# Altium PCB CCE_Simonduino_01.PcbDoc
Units mil, origin at the board's own origin, x right, y up, seen from the top; angles counter-clockwise.
Board outline 4000 x 4000 mil, 2 copper layers (Top Layer, Bottom Layer), stack 62.8 mil thick; 87 components, 68 nets, 309 pads, 113 vias.
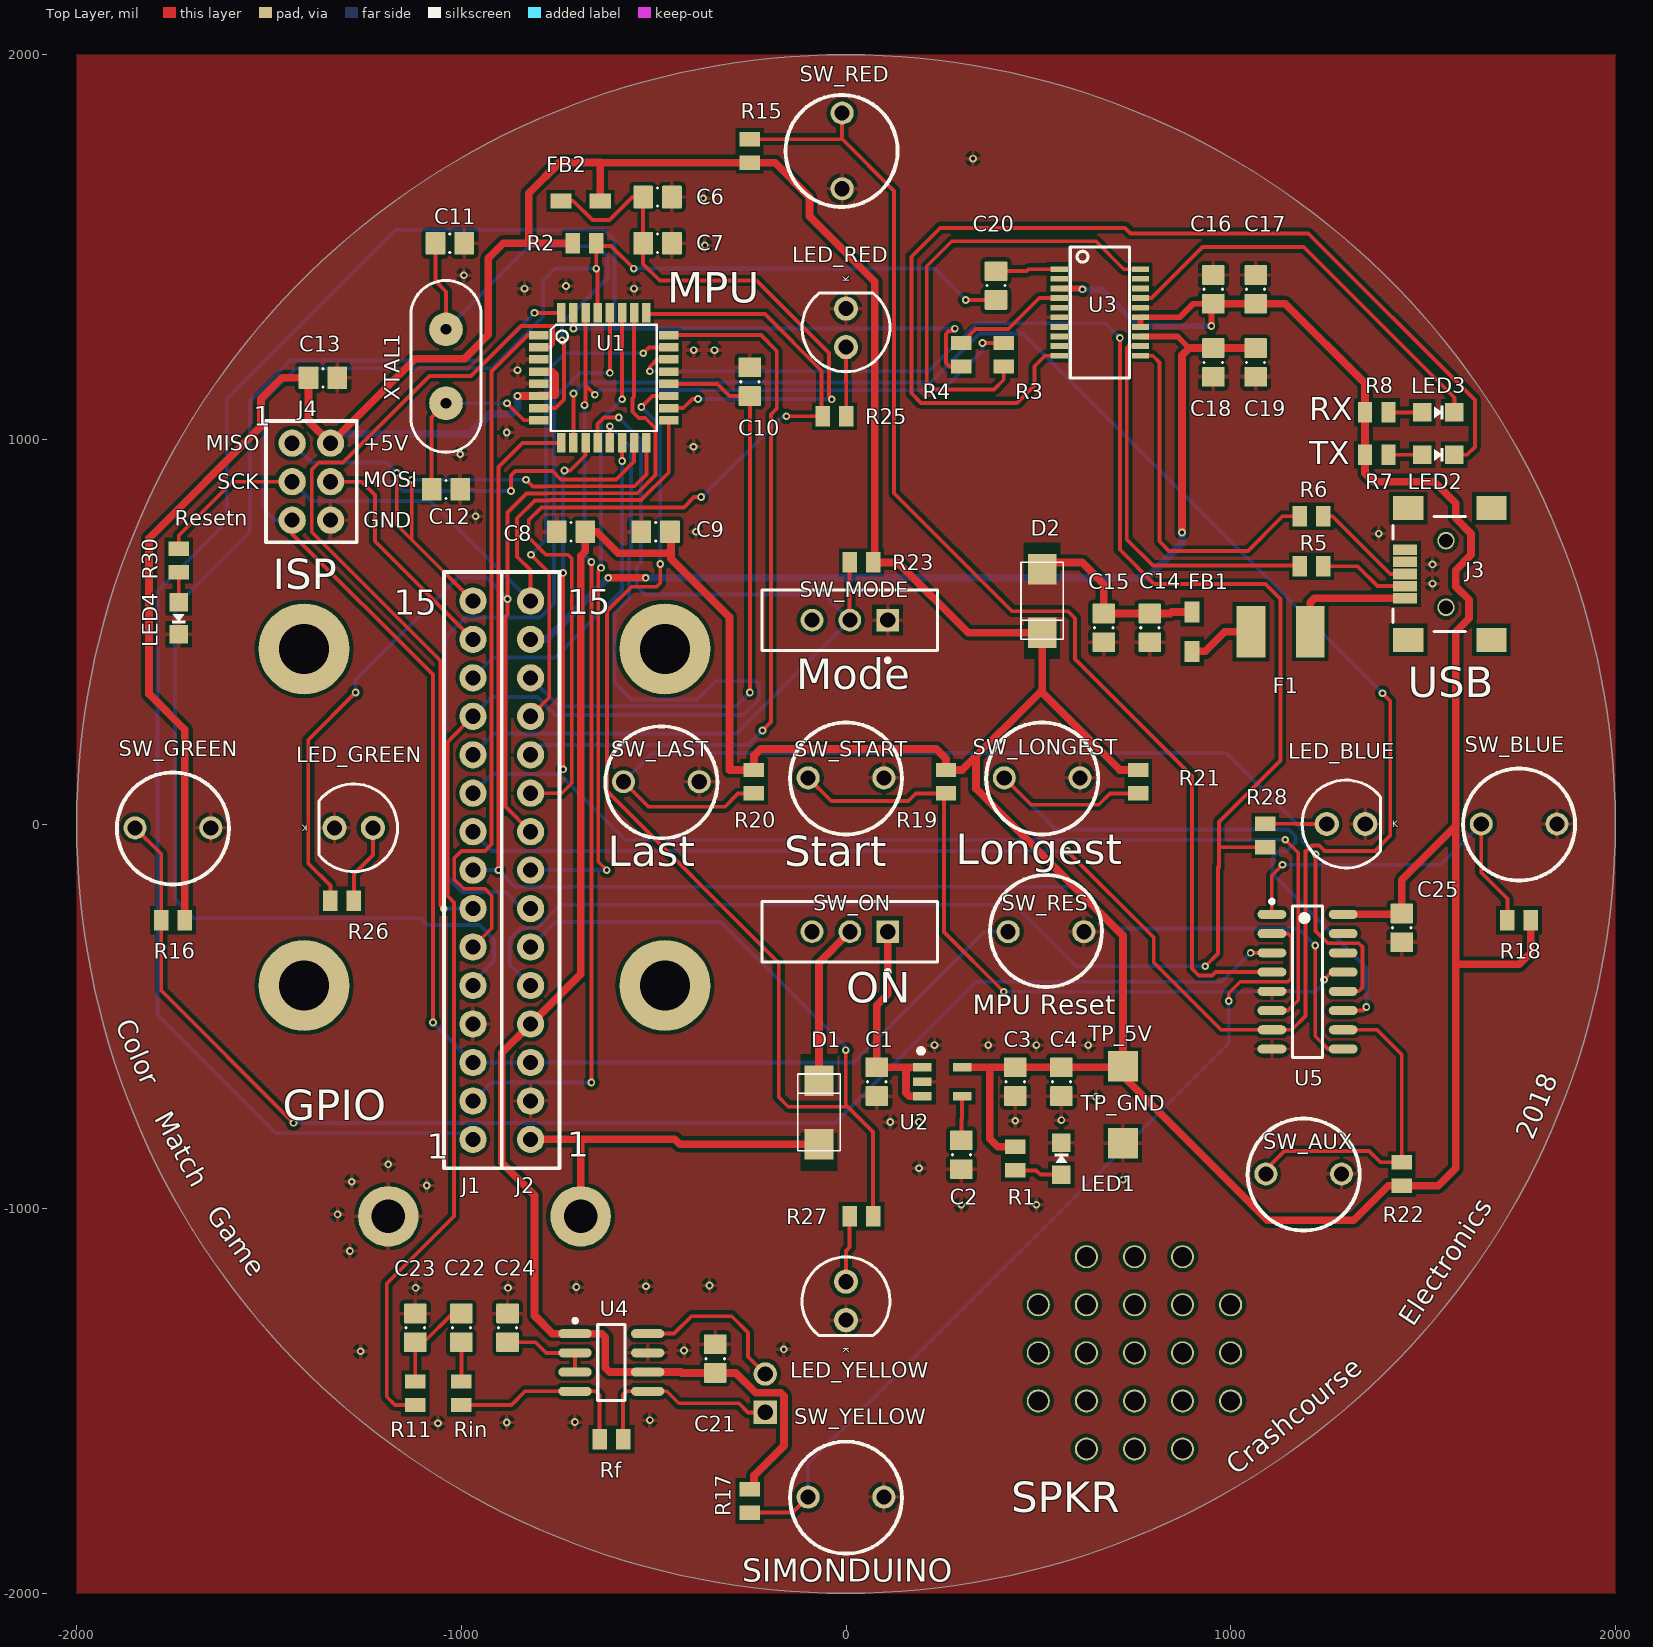
[diagram p0: Top Layer view]
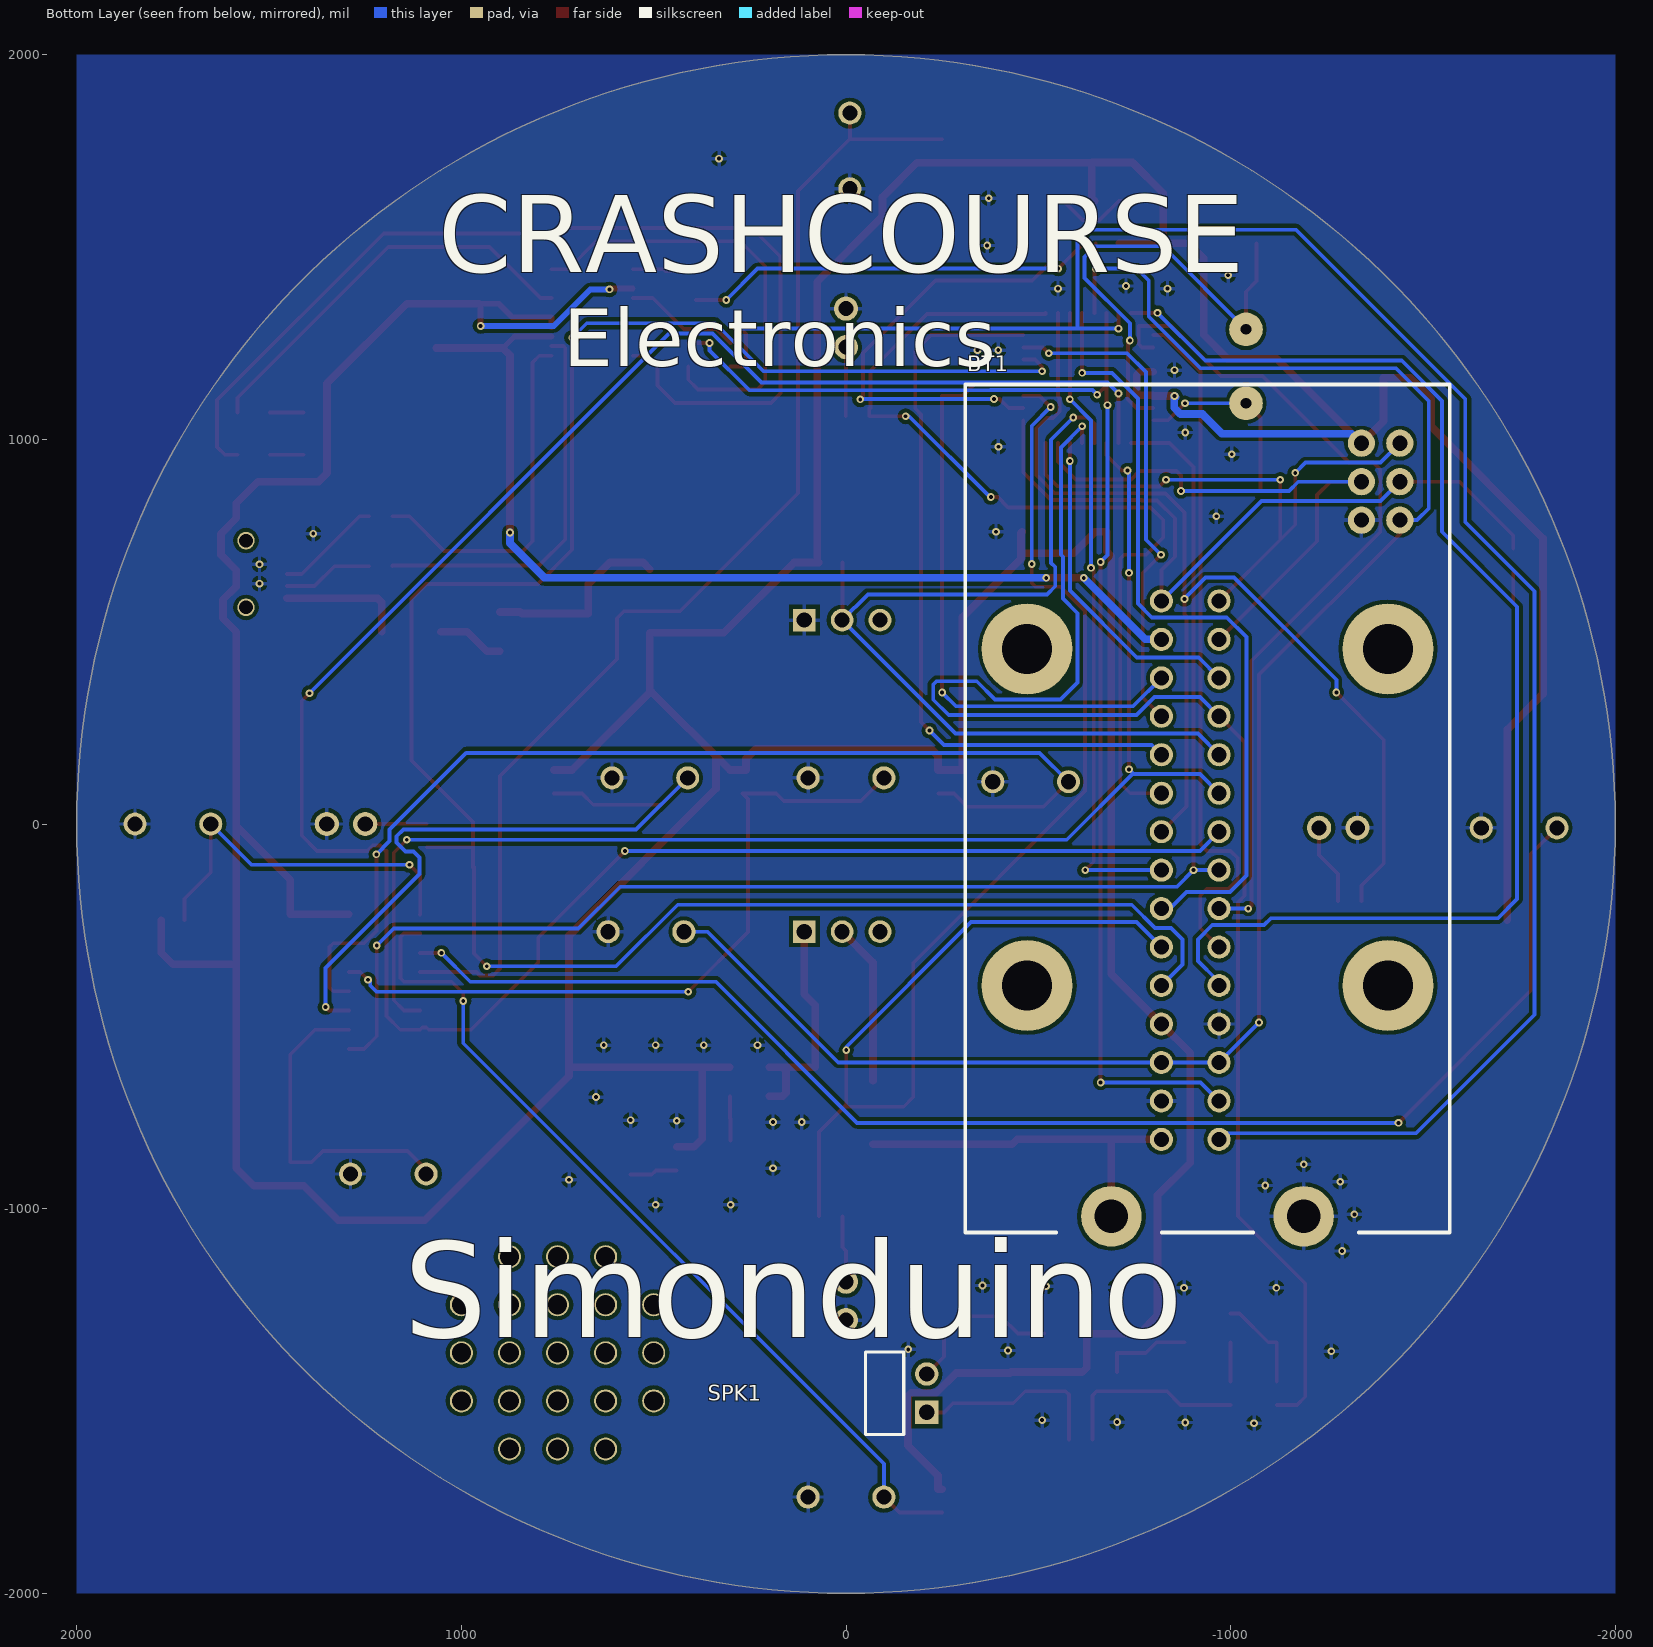
[diagram p1: Bottom Layer view, seen from below]

## Layer stack, top to bottom
Top Solder: solder mask 1, Solder Resist, Dk 3.5
Top Layer: signal copper 1.4
Dielectric 1: core 60, FR-4, Dk 4.6
Bottom Layer: signal copper 1.4
Bottom Solder: solder mask 1, Solder Resist, Dk 3.5

## Board outline
-2000,0 ccw(c0,0) 0,-2000 ccw(c0,0) 2000,0 ccw(c0,0) 0,2000 ccw(c0,0)

## Design rules (kind name [scope] priority, off if disabled: settings)
AssemblyTestPointUsage AssemblyTestPointUsage_1 [All] p2:
AssemblyTestpoint AssemblyTestpoint_1 [All] p2: testpointundercomponent=TRUE minsize=40 maxsize=100 preferedsize=60 minholesize=0 maxholesize=40 preferedholesize=32 testpointgrid=1 usegrid=TRUE gridtolerance=0.01 allowsidetop=TRUE allowsidebottom=TRUE
Clearance [All] p1: gap=10 ignorepadtopadclearanceinfootprint=FALSE except(0: Arc-Hole Track-Hole SMDPad-Hole THPad-Hole Via-Hole Fill-Hole Poly-Hole Region-Hole Text-Hole)
Clearance Clearance_1 [All] p2: gap=8 ignorepadtopadclearanceinfootprint=FALSE except(0: Arc-Hole Track-Hole SMDPad-Hole THPad-Hole Via-Hole Fill-Hole Poly-Hole Region-Hole Text-Hole)
ComponentClearance ComponentClearance_1 [All] p2: gap=10 collisioncheckmode=3 verticalgap=10 showdistances=FALSE
DiffPairsRouting DiffPairsRouting_1 [All] p2: maxlimit=10 minlimit=10 mostfreqgap=10 toplayer_minwidth=15 toplayer_maxwidth=15 toplayer_prefwidth=15 bottomlayer_minwidth=15 bottomlayer_maxwidth=15 bottomlayer_prefwidth=15 maxuncoupledlength=500
FabricationTestPointUsage FabricationTestPointUsage_1 [All] p2: valid=0 allowmultiple=FALSE
FabricationTestpoint FabricationTestpoint_1 [All] p2: side=3 testpointundercomponent=TRUE minsize=40 maxsize=100 preferedsize=60 minholesize=0 maxholesize=40 preferedholesize=32 testpointgrid=1 allowsidetop=TRUE allowsidebottom=TRUE usegrid=TRUE gridtolerance=0.01
FanoutControl Fanout_LCC [IsLCC] p1: bgadir=Out bgaviamode=Centered fanoutstyle=Auto fanoutdirection=Alternating viagrid=1 // Fanout_LCC (Default Rule)
FanoutControl Fanout_BGA [IsBGA] p2: bgadir=Out bgaviamode=Centered fanoutstyle=Auto fanoutdirection=Alternating viagrid=1 // Fanout_BGA (Default Rule)
FanoutControl Fanout_Default [All] p4: bgadir=Out bgaviamode=Centered fanoutstyle=Auto fanoutdirection=Alternating viagrid=1 // Fanout_Default (Default Rule)
FanoutControl Fanout_Small [(CompPinCount < 5)] p5: bgadir=Out bgaviamode=Centered fanoutstyle=Auto fanoutdirection=OutThenIn viagrid=1 // Fanout_Small (Default Rule)
FanoutControl Fanout_BGA_1 [IsBGA] p6: bgadir=Out bgaviamode=Centered fanoutstyle=Auto fanoutdirection=Alternating viagrid=1 // Fanout_BGA (Default Rule)
FanoutControl Fanout_LCC_1 [IsLCC] p7: bgadir=Out bgaviamode=Centered fanoutstyle=Auto fanoutdirection=Alternating viagrid=1 // Fanout_LCC (Default Rule)
FanoutControl Fanout_SOIC_1 [IsSOIC] p8: bgadir=Out bgaviamode=Centered fanoutstyle=Auto fanoutdirection=Alternating viagrid=1 // Fanout_SOIC (Default Rule)
FanoutControl Fanout_Small_1 [(CompPinCount < 5)] p9: bgadir=Out bgaviamode=Centered fanoutstyle=Auto fanoutdirection=OutThenIn viagrid=1 // Fanout_Small (Default Rule)
FanoutControl Fanout_Default_1 [All] p10: bgadir=Out bgaviamode=Centered fanoutstyle=Auto fanoutdirection=Alternating viagrid=1 // Fanout_Default (Default Rule)
Height Height_1 [All] p2: minheight=0 maxheight=1000 prefheight=500
HoleSize HoleSize_1 [All] p2: absolutevalues=TRUE maxlimit=100 minlimit=1 maxpercent=80.000 minpercent=20.000
HoleToHoleClearance HoleToHoleClearance_1 [All] p2: gap=10 allowstackedmicrovias=TRUE
LayerPairs LayerPairs_1 [All] p2: enforce=TRUE
MinimumSolderMaskSliver MinimumSolderMaskSliver_1 [All] p2: minsoldermaskwidth=10
NetAntennae NetAntennae_1 [All] p2: netantennaetolerance=0
PasteMaskExpansion PasteMaskExpansion_1 [All] p2: expansion=0
PlaneClearance PlaneClearance_1 [All] p2: clearance=20
PlaneConnect PlaneConnect_1 [All] p2: planeconnectstyle=Relief reliefexpansion=20 reliefentries=4 reliefconductorwidth=10 reliefairgap=10
PolygonConnect [All] p1: connectstyle=Relief reliefconductorwidth=10 reliefentries=4 polygonreliefangle="90 Angle" airgapwidth=10
PolygonConnect PolygonConnect_1 [All] p2: connectstyle=Relief reliefconductorwidth=10 reliefentries=4 polygonreliefangle="90 Angle" airgapwidth=10
RoutingCorners RoutingCorners_1 [All] p2: cornerstyle=45-Degree minsetback=100 maxsetback=100
RoutingLayers RoutingLayers_1 [All] p2: top layer_v5=TRUE bottom layer_v5=TRUE
RoutingPriority RoutingPriority_1 [All] p2: routingpriority=0
RoutingTopology RoutingTopology_1 [All] p2: topology=Shortest
RoutingVias [All] p1: holewidth=28 width=50 viastyle="Through Hole" minholewidth=28 minwidth=50 maxholewidth=28 maxwidth=50
RoutingVias RoutingVias_1 [All] p2: holewidth=10 width=20 viastyle="Through Hole" minholewidth=10 minwidth=20 maxholewidth=10 maxwidth=20
ShortCircuit ShortCircuit_1 [All] p2: allowed=FALSE
SilkToBoardRegionClearance SilkToBoardRegionClearance_1 [All] p2:
SilkToSilkClearance SilkToSilkClearance_1 [All] p2: silktosilkclearance=10
SilkToSolderMaskClearance SilkToSolderMaskClearance_1 [IsPad] p2: minsilkscreentomaskgap=10 clearancetoexposedcopper=TRUE
SolderMaskExpansion [All] p1: expansion=4
SolderMaskExpansion SolderMaskExpansion_1 [All] p2: expansion=4
UnRoutedNet UnRoutedNet_1 [All] p2:
UnpouredPolygon UnpouredPolygon_1 [All] p2:
Width [All] p1: maxlimit=10 minlimit=10 preferedwidth=10
Width Width_3_3V [InNet('VCC_3_3V')] p2: maxlimit=30 minlimit=10 preferedwidth=20
Width Width_VBAT [InNet('VBAT')] p3: maxlimit=30 minlimit=10 preferedwidth=20
Width Width_5V [InNet('VCC_5V')] p4: maxlimit=30 minlimit=10 preferedwidth=20
Width Width_VCC_USB [InNet('VCC_USB')] p5: maxlimit=30 minlimit=10 preferedwidth=20
Width Width_VIN [InNet('VIN')] p6: maxlimit=30 minlimit=10 preferedwidth=20
Width Width_VIN_SW [InNet('VIN_SW')] p7: maxlimit=30 minlimit=10 preferedwidth=20
Width Width_1 [All] p8: maxlimit=12 minlimit=8 preferedwidth=10
26 further rules are at their usual default settings.

## Components (designator, comment, footprint, x,y, rotation, side; value= is the part's Value field where it differs from the comment)
BT1 "Keystone Electronics 1294" PCB-3798-1 -940,40 r90 bottom locked
C1 "22uF" RLP133A 80,-670 r90 top
C2 "470pF" RLP133A 300,-860 r90 top
C3 "10uF" RLP133A 440,-670 r90 top
C4 "0.1uF" RLP133A 560,-670 r90 top
C6 "10uF" RLP133A -490,1630 r180 top
C7 "0.1uF" RLP133A -490,1510 r180 top
C8 "22uF" RLP133A -715,760 r0 top
C9 "0.1uF" RLP133A -495,760 r0 top
C10 "0.1uF" RLP133A -250,1150 r90 top
C11 "18pf" RLP133A -1030,1510 r0 top
C12 "18pf" RLP133A -1040,870 r0 top
C13 "0.1uF" RLP133A -1360,1160 r0 top
C14 "10uF" RLP133A 790,510 r90 top
C15 "0.1uF" RLP133A 670,510 r90 top
C16 "10uF" RLP133A 955,1390 r270 top
C17 "0.1uF" RLP133A 1065,1390 r270 top
C18 "10uF" RLP133A 955,1200 r90 top
C19 "0.1uF" RLP133A 1065,1200 r90 top
C20 "0.1uF" RLP133A 390,1400 r90 top
C21 "10uF" RLP133A -340,-1390 r270 top
C22 "10uF" RLP133A -1000,-1310 r90 top
C23 "1uF" RLP133A -1120,-1310 r90 top
C24 "10uF" RLP133A -880,-1310 r270 top
C25 "0.1uF" RLP133A 1445,-270 r90 top
D1 "PMEG3030EP,115" PCB-ylvpw7uho1dkst7hexks-1 -70,-750 r90 top
D2 "PMEG3030EP,115" PCB-ylvpw7uho1dkst7hexks-1 510,580 r270 top
F1 "Bourns MF-MSMF050-2" L1812 1130,500 r0 top
FB1 "BLM21AG102SN1D" MURA-BLM21-H1-CHIP-2_V 900,500 r270 top
FB2 "BLM21AG102SN1D" MURA-BLM21-H1-CHIP-2_V -690,1620 r180 top
J1 "Samtec TSW-115-07-T-S" PCB-ss9uik38su1ryg1jck95-1 -970,-820 r90 top
J2 "Samtec TSW-115-07-T-S" PCB-ss9uik38su1ryg1jck95-1 -820,-820 r90 top
J3 "EDAC 690-005-299-043" PCB-0dqtvzwtjwndkeioqta0-1 1560,650 r180 top
J4 "SYM-e08529dd31623f42-6" PCB-2h1t0rpz2tx2wsc79kkt-1 -1390,890 r0 top
LED1 "Kingbright APT2012SGC" CHIPLED_0805_NOOUTLINE 560,-870 r0 top
LED2 "Kingbright APT2012EC" CHIPLED_0805_NOOUTLINE 1540,960 r270 top
LED3 "Kingbright APT2012SGC" CHIPLED_0805_NOOUTLINE 1540,1070 r270 top
LED4 "Kingbright APT2012YC" CHIPLED_0805_NOOUTLINE -1735,535 r180 top
LED_BLUE "BLUE" PCB-teu6t62n2bsx7jl1if62-1 1300,0 r0 top
LED_GREEN "GREEN" PCB-teu6t62n2bsx7jl1if62-1 -1280,-10 r180 top
LED_RED "RED" PCB-teu6t62n2bsx7jl1if62-1 0,1290 r90 top
LED_YELLOW "YELLOW" PCB-teu6t62n2bsx7jl1if62-1 0,-1240 r270 top
R1 "330 ohm" RESC2013X70X40LL20T20 440,-870 r270 top
R2 "10K" RESC2013X70X40LL20T20 -680,1510 r180 top
R3 "1K" RESC2013X70X40LL20T20 410,1220 r270 top
R4 "1K" RESC2013X70X40LL20T20 300,1220 r90 top
R5 "27 ohm" RESC2013X70X40LL20T20 1210,670 r0 top
R6 "27 ohm" RESC2013X70X40LL20T20 1210,800 r0 top
R7 "330 ohm" RESC2013X70X40LL20T20 1380,960 r0 top
R8 "330 ohm" RESC2013X70X40LL20T20 1380,1070 r0 top
R11 "1K" RESC2013X70X40LL20T20 -1120,-1480 r270 top
R15 "10K" RESC2013X70X40LL20T20 -250,1750 r90 top
R16 "10K" RESC2013X70X40LL20T20 -1750,-250 r180 top
R17 "10K" RESC2013X70X40LL20T20 -250,-1760 r270 top
R18 "10K" RESC2013X70X40LL20T20 1750,-250 r180 top
R19 "10K" RESC2013X70X40LL20T20 260,110 r270 top
R20 "10K" RESC2013X70X40LL20T20 -240,110 r270 top
R21 "10K" RESC2013X70X40LL20T20 760,110 r270 top
R22 "10K" RESC2013X70X40LL20T20 1445,-910 r90 top
R23 "10K" RESC2013X70X40LL20T20 40,680 r180 top
R25 "200" RESC2013X70X40LL20T20 -30,1060 r0 top
R26 "200" RESC2013X70X40LL20T20 -1310,-200 r0 top
R27 "200" RESC2013X70X40LL20T20 40,-1020 r180 top
R28 "200" RESC2013X70X40LL20T20 1090,-30 r90 top
R30 "1K" RESC2013X70X40LL20T20 -1735,685 r270 top
Rf "10K" RESC2013X70X40LL20T20 -610,-1600 r0 top
Rin "10K" RESC2013X70X40LL20T20 -1000,-1480 r270 top
SPK1 "TSW-102-22-L-S-RA" SMTC-TSW-102-22-X-S-RA -210,-1530 r90 bottom
SW_AUX "Panasonic EVQ-21405R" PCB-je10m8m3eogq13l465bo-1 1190,-910 r90 top
SW_BLUE "Panasonic EVQ-21405R" PCB-je10m8m3eogq13l465bo-1 1750,0 r90 top
SW_GREEN "Panasonic EVQ-21405R" PCB-je10m8m3eogq13l465bo-1 -1750,-10 r90 top
SW_LAST "Panasonic EVQ-21405R" PCB-je10m8m3eogq13l465bo-1 -480,110 r90 top
SW_LONGEST "Panasonic EVQ-21405R" PCB-je10m8m3eogq13l465bo-1 510,120 r90 top
SW_MODE "E-Switch EG1218" ESWI-EG1218_V 10,530 r180 top
SW_ON "E-Switch EG1218" ESWI-EG1218_V 10,-280 r180 top
SW_RED "Panasonic EVQ-21405R" PCB-je10m8m3eogq13l465bo-1 -10,1750 r0 top
SW_RES "Panasonic EVQ-21405R" PCB-je10m8m3eogq13l465bo-1 520,-280 r270 top
SW_START "Panasonic EVQ-21405R" PCB-je10m8m3eogq13l465bo-1 0,120 r90 top
SW_YELLOW "Panasonic EVQ-21405R" PCB-je10m8m3eogq13l465bo-1 0,-1750 r90 top
TP_5V "2x2mm-pad" PCB-iek5qk9ganu4yn12lo6h-1 720,-630 r90 top
TP_GND "2x2mm-pad" PCB-iek5qk9ganu4yn12lo6h-1 720,-830 r90 top
U1 "ATMEGA328P-AU" TQFP32-08 -630,1160 r0 top
U2 "Microchip MIC5219-5.0YM5-TR" PCB-wkjlo8hhy83bmub82728-1 250,-670 r270 top
U3 "FT231XS-R" SSOP20_L 660,1330 r270 top
U4 "IS31AP4991A 1.1W Amp" PCB-9rmbxp4o58shl47xlmib-1 -610,-1400 r0 top
U5 "SN74HC148N" PCB-humlfp2qb5uk19pmpc47-1 1200,-410 r0 top
XTAL1 "16Mhz" PCB-tw4o7k9ciwtd4bkcirmp-1 -1040,1190 r90 top

## Footprints (in the part's own frame and the unit in brackets; to place one, negate y for a bottom-side part, rotate by r counter-clockwise, add the part's x,y. Pads: shape width x height; smd on the part's side, far side on the other; paste and mask are expansions set on the pad)
CHIPLED_0805_NOOUTLINE [mil] "CHIPLED_0805_NOOUTLINE"
  rect 48x48 smd: A(0,-41.67) C(0,41.67)
  silkscreen extent -18,-10 18,14, body extent -25,-39 25,39, height 30
ESWI-EG1218_V [mm] "THD, 3-Leads, Body 11.6x4mm, Pitch 2.5mm"
  rect 1.5x1.5 hole 1: 1(-2.5,0)
  round 1.5 hole 1: 2(0,0) 3(2.5,0)
  silkscreen extent -5.8,-2 5.8,2.77, body extent -5.8,-2 5.8,2, height 7.43
L1812 [mil] "L1812"
  rect 75x134 smd: 1(-76.77,0) 2(77,0)
  body extent -90,-64 90,64, height 33
MURA-BLM21-H1-CHIP-2_V [mm] "Chip Ferrite Bead, 2-Leads, Body 2x1.25mm, Height 1.05mm"
  rect 1.4x1 smd: 1(-1.3,0) 2(1.3,0)
  body extent -1,-0.63 1,0.63, height 1.05
PCB-0dqtvzwtjwndkeioqta0-1 [mm] "USB-MINIB_A"
  round 1.154 hole 0.9 unplated: 1(0,2.2) 1(0,-2.2)
  rect 1.6x0.7 smd: D+(2.7,0) D-(2.7,0.8) GND(2.7,-1.6) ID(2.7,-0.8) VBUS(2.7,1.6)
  rect 2x1.6 smd: MTN1(-3,4.35) MTN2(2.5,4.35) MTN3(-3,-4.35) MTN4(2.5,-4.35)
  silkscreen extent -1.3,-3.8 3.5,3.8, body extent -5.85,-4.95 3.55,4.95, height 4.05
PCB-2h1t0rpz2tx2wsc79kkt-1 [mm]
  round 1.8 hole 1: 1(-1.27,2.54) 2(1.27,2.54) 3(-1.27,0) 4(1.27,0) 5(-1.27,-2.54) 6(1.27,-2.54)
  silkscreen extent -3,-4 3,4, body extent -2.54,-3.82 2.54,3.8, height 8.65
PCB-9rmbxp4o58shl47xlmib-1 [mm] "SOIC, 8-Leads, Body 4.9x3.9mm, Pitch 1.27mm, IPC Medium Density"
  oval 2.2x0.6 smd: 1(-2.4,1.905) 2(-2.4,0.635) 3(-2.4,-0.635) 4(-2.4,-1.905) 5(2.4,-1.905) 6(2.4,-0.635) 7(2.4,0.635) 8(2.4,1.905)
  silkscreen extent -2.52,-2.5 0.9,2.88, body extent -2,-2.5 2,2.5, height 1.7
PCB-3798-1 [mm]
  round 6 hole 3.3: 0(-11.685,-11.915) 0(-11.685,11.915) 0(10.545,-11.915) 0(10.545,11.915)
  round 4 hole 2.2: 1(-26.925,6.35) 2(-26.925,-6.35)
  silkscreen extent -28,-16 28,16, body extent -27.56,-14.73 27.05,14.83, height 20.59
PCB-humlfp2qb5uk19pmpc47-1 [mm] "SOIC, 16-Leads, Body 9.9x3.9mm, Pitch 1.27mm, IPC High Density"
  oval 1.9x0.6 smd: 1(-2.35,4.445) 2(-2.35,3.175) 3(-2.35,1.905) 4(-2.35,0.635) 5(-2.35,-0.635) 6(-2.35,-1.905) 7(-2.35,-3.175) 8(-2.35,-4.445) 9(2.35,-4.445) 10(2.35,-3.175) 11(2.35,-1.905) 12(2.35,-0.635) 13(2.35,0.635) 14(2.35,1.905) 15(2.35,3.175) 16(2.35,4.445)
  silkscreen extent -2.47,-5 1,5.42, body extent -1.99,-5 1.99,5, height 1.75
PCB-iek5qk9ganu4yn12lo6h-1 [mm]
  rect 2x2 smd: 1(0,0)
PCB-je10m8m3eogq13l465bo-1 [mil]
  round 60 hole 39.37: 1(0,-98.43) 2(0,98.43)
  silkscreen extent -147,-146 144,146, body extent -118,-118 118,118, height 394
PCB-ss9uik38su1ryg1jck95-1 [mm]
  round 1.8 / inner round 1.524 / far side round 1.524 hole 1: 1(0,0) 2(2.54,0) 3(5.08,0) 4(7.62,0) 5(10.16,0) 6(12.7,0) 7(15.24,0) 8(17.78,0) 9(20.32,0) 10(22.86,0) 11(25.4,0) 12(27.94,0) 13(30.48,0) 14(33.02,0) 15(35.56,0)
  silkscreen extent -1.91,-1.91 37.46,1.91, body extent -1.4,-1.27 36.83,1.27, height 8.38
PCB-teu6t62n2bsx7jl1if62-1 [mm] "THT, LED-5mm, 2pin- Body 5.8mm"
  round 1.6 hole 1: 1(1.27,0) 2(-1.27,0)
  silkscreen extent -2.9,-2.9 2.29,2.9, body extent -2.9,-2.9 2.5,2.9, height 11.9
PCB-tw4o7k9ciwtd4bkcirmp-1 [mil]
  round 87.5 hole 27.56: 1(-96.06,0) 2(96.06,0)
  silkscreen extent -223,-92 223,92, body extent -216,-88 216,88, height 142
PCB-wkjlo8hhy83bmub82728-1 [mil] "SOT23-5L"
  rect 22x48 smd: 1(-37.4,-51.18) 2(0,-51.18) 3(38,-51.18) 4(38,52) 5(-37.4,52)
  silkscreen extent -85,-60 -75,-50, body extent -57,-55 57,55, height 57
PCB-ylvpw7uho1dkst7hexks-1 [mm]
  rect 2x1.9 smd: 1(-2.1,0) 2(2.1,0)
  silkscreen extent -2.54,-1.4 2.54,1.4, body extent -2.5,-1.35 2.5,1.35, height 1.1
RESC2013X70X40LL20T20 [mm] "RESC2013X70X40LL20T20"
  rect 0.95x1.35 smd: 1(-0.775,0) 2(0.775,0)
  body extent -1.1,-0.72 1.1,0.72, height 0.7
RLP133A [mm] "Chip Capacitor 0805 (2012)"
  rrect10% 1.3x1.5 smd: 1(-0.95,0) 2(0.95,0)
  silkscreen extent -0.01,-0.6 0.01,0.6, body extent -1,-0.6 1,0.6, height 1.2
SMTC-TSW-102-22-X-S-RA [mm] ".025 SQ Post Terminal Strip Assembly, 1x2 Pins, Right Angle, 2.54mm Pitch, Male"
  rect 1.55x1.55 hole 1.02: 1(0,0)
  round 1.55 hole 1.02: 2(2.54,0)
  silkscreen extent -1.46,1.52 4,4.06, body extent -1.27,-0.32 3.81,9.9, height 3.05
SSOP20_L [mil] "SSOP20_L"
  rect 15x45 smd: 1(-112.5,-105.5) 2(-87.5,-105.5) 3(-62.5,-105.5) 4(-37.5,-105.5) 5(-12.5,-105.5) 6(12.5,-105.5) 7(37.5,-105.5) 8(62.5,-105.5) 9(87.5,-105.5) 10(112.5,-105.5) 11(112.5,105.5) 12(87.5,105.5) 13(62.5,105.5) 14(37.5,105.5) 15(12.5,105.5) 16(-12.5,105.5) 17(-37.5,105.5) 18(-62.5,105.5) 19(-87.5,105.5) 20(-112.5,105.5)
  silkscreen extent -170,-77 170,77, body extent -170,-118 170,118, height 69
TQFP32-08 [mil] "TQFP32-08"
  rect 50x22 smd: 1(-169,111) 2(-169,79) 3(-169,48) 4(-169,16) 5(-169,-15.75) 6(-169,-47.24) 7(-169,-78.74) 8(-169,-110.24) 17(169,-110.24) 18(169,-78.74) 19(169,-47.24) 20(169,-15.75) 21(169,16) 22(169,48) 23(169,79) 24(169,111)
  rect 22x50 smd: 9(-110.24,-169) 10(-78.74,-169) 11(-47.24,-169) 12(-15.75,-169) 13(16,-169) 14(48,-169) 15(79,-169) 16(111,-169) 25(111,169) 26(79,169) 27(48,169) 28(16,169) 29(-15.75,169) 30(-47.24,169) 31(-78.74,169) 32(-110.24,169)
  silkscreen extent -138,-138 138,138, body extent -177,-177 177,177, height 47

## Part data
BT1: library part 1294, "HOLDER BATT 9V UNIV PLASTIC PC"
C1 C3 C4 C6 C7 C8 C9 C10 C11 C12 C13 C14 C15 C16 C17 C18 C19 C20 C21 C22 C23 C24 C25: library part 08055C104KAT2A, "Generic Multilayer Ceramic Capacitor SMD 0805 (2012)"
C2: library part CMP-3c98f6df3913e35f-11, "Generic Multilayer Ceramic Capacitor SMD 0805 (2012)"
D1 D2: "PMEG3030EP 3 A 30 Vrrm SMT MEGA Schottky Barrier Rectifier - SOD-128F"
F1: library part MF-MSMF050-2, "PTC RESETTABLE .50A 15V 1812"
FB1 FB2: "Chip Ferrite Bead for General Signal lines, 1000 Ohm, 500 mA, -55 to 125 degC, 2 x 1.25 x 1.05 mm SMD, Tape and Reel"
J1 J2: library part TSW-115-07-T-S, "Conn Unshrouded Header HDR 15 POS 2.54mm Solder ST Thru-Hole Automotive Bulk"
J3: library part CMP-f10139da97e32ec6-2, "5 Pin Right Angle Surface Mount Mini USB Type B"
J4: library part M20-9980346, "2.54mm (0.1\") Pitch DIL Vertical PC Tail Pin Header, 6.1mm mating pin height, tin, 3+3 contacts"
LED1 LED3: library part APT2012SGC, "LED 2X1.2MM 568NM GN WTR CLR SMD"
LED2: library part APT2012EC, "LED 2X1.2MM 625NM RD WTR CLR SMD"
LED4: library part CMP-1546221-2, "LED 2X1.2MM 568NM GN WTR CLR SMD"
LED_BLUE LED_GREEN LED_RED LED_YELLOW: library part CMP-92bb5b2eff764d7c-3, "LED Uni-Color Green 2-Pin T-1 3/4 Bulk"
R1 R2 R3 R4 R5 R6 R7 R8 R11 R15 R16 R17 R18 R19 R20 R21 R22 R23 R25 R26 R27 R28 R30 Rf Rin: library part ERJ-6ENF1001V, "@ RESISTOR,SMT,0805,1K OHM, +/-1%,+-100ppm,THICKFILM(100)"
SPK1: "0.025\" SQ Post Header, Through-hole, Right Angle, -55 to 125 degC, 2.54 mm Pitch, 2-Pin, Male, RoHS"
SW_AUX SW_BLUE SW_GREEN SW_LAST SW_LONGEST SW_RED SW_RES SW_START SW_YELLOW: library part CMP-2fe5e5be239cf022-2, "Switch Tactile N.O. SPST Round Button PC Pins 0.02A 15VDC 1.3N Thru-Hole Radial T/R"
SW_MODE SW_ON: library part CMP-9a5a5340a2f5459d-7, "Slide Switch, 500 V, -20 to 70 degC, 3-Pin THD, RoHS"
TP_5V TP_GND: library part RCT-0C, "Raychem; SMT Circuit probe pad, 0805, 0R0 RCT"
U1: "Embedded microcontroller ATMEGA328P-AU TQFP 32 (7x7) Microchip Technology 8-Bit 20 MHz I/O number 23"
U2: library part CMP-8be04111fcdb5427-1, "MIC5219 Series 500 mA 5 V Fixed Output Surface Mount LDO Regulator - SOT-23-5"
U3: "USB Full Speed to Full Handshake UART with USB Charger Detection"
U4: library part IS31AP4991A-GRLS2-TR, "Audio Amp Speaker 1-CH Mono 1.4W Class-AB 8-Pin SOP T/R"
U5: "8-Line To 3-Line Priority Encoders 16-SOIC -40 to 85"
XTAL1: library part 9B-16.000MEEJ-B, "Crystal 16.0000 MHz"

## Free pads (board coordinates)
  round 60 hole 50: 0(500,-1500) 0(500,-1375) 0(500,-1250) 0(625,-1625) 0(625,-1500) 0(625,-1375) 0(625,-1250) 0(625,-1125) 0(750,-1625) 0(750,-1500) 0(750,-1375) 0(750,-1250) 0(750,-1125) 0(875,-1625) 0(875,-1500) 0(875,-1375) 0(875,-1250) 0(875,-1125) 0(1000,-1500) 0(1000,-1375) 0(1000,-1250)

## Via types
v1: diameter 20, hole 10, Top Layer to Bottom Layer, 113 vias

## Nets (pads, with @x,y where several pads share a name; then routed paths per layer and width w, separated by ;. In a path a pad name is that pad's centre, name@x,y a point inside that pad or via, vN(x,y) a via of type N, cw(c..) or ccw(c..) an arc to the next point about the centre after c; other vN are vias at no path point)
GND: BT1.2 C1.1 C2.1 C3.1 C4.1 C6.1 C7.1 C8.1 C9.1 C10.2 C11.2 C12.2 C13.2 C14.1 C15.1 C16.1 C17.1 C18.1 C19.1 C21.1 C23.2 C24.1 C25.1 J1.4 J2.2 J4.6 LED1.C LED4.C LED_BLUE.1 LED_GREEN.1 LED_RED.1 LED_YELLOW.1 SW_AUX.1 SW_BLUE.1 SW_GREEN.1 SW_LAST.1 SW_LONGEST.1 SW_MODE.1 SW_RED.1 SW_RES.2 SW_START.1 SW_YELLOW.1 TP_GND.1 U1.3 U1.5 U1.21 U2.2 U3.6 U3.16 U4.7 U5.5 U5.8
  other v1: -1061,-1558 -882,-1556 -705,-1555 -510,-1550 -1262,-1371 -421,-1369 -162,-1366 -1119,-1206 -879,-1206 -701,-1204 -520,-1202 -355,-1200 -1290,-1110 -1321.66,-1015.04 300,-990 495,-990 -1090,-940 -1285,-930 720,-925 190,-895 -1190,-885 115,-775 190,-775 440,-771.65 560,-770 650,-710 230,-575 370,-575 495,-575 630,-575 1525,625 1525,675 1385,755 -390,760 -963,800 -1003.02,961.44 -396.26,981 -882,1018 -854,1180 -396,1232 -342,1232 -836,1392 -551,1392 -728,1399 -993.6,1426.77 -367,1504 -371,1627 330,1730
NetC2_2: C2.2 U2.4 | length 115.4
  Top Layer w10: C2.2 300,-767 302,-765 U2.4
NetC6_2: C6.2 C7.2 FB2.2 U1.18 | length 1570
  Top Layer w10: FB2.2 -709,1620 -659,1570 -615,1570 -555,1630 C6.2 C7.2 -527.4,1456 -484.4,1413 -233,1413 -44.5,1224.5 -44.5,1111.5 v1(-37,1104) ; U1.18 -423,1081.26 -399.26,1105 v1(-385,1105)
  Bottom Layer w10: v1(-385,1105) -38,1105 v1(-37,1104)
NetC10_1: C10.1 J2.13 U1.20 | length 1611.3
  Top Layer w10: U1.20 -335,1144.25 -335,1145 -302.6,1112.6 C10.1 v1(-250,342)
  Bottom Layer w10: J2.13 -746.05,306.05 -285.95,306.05 v1(-250,342)
NetC11_1: C11.1 U1.7 XTAL1.2 | length 1253
  Top Layer w10: C11.1 -1067.4,1411.4 -1040,1384 XTAL1.2 ; U1.7 -755.74,1081.26 -733,1104 -733,1252 v1(-738,1257)
  Bottom Layer w10: XTAL1.2 -824.06,1502 -647.46,1502 -620,1474.54 -620,1420 -738,1302 v1(-738,1257)
NetC12_1: C12.1 U1.8 XTAL1.1 | length 498.7
  Top Layer w10: C12.1 -1077.4,1056.54 XTAL1.1 ; v1(-881.17,1093.94) -837,1049.76 U1.8
  Bottom Layer w10: XTAL1.1 v1(-881.17,1093.94)
NetC20_1: C20.1 J1.3 J2.3 J4.5 R2.1 SW_RES.1 U1.29 | length 5847.5
  Top Layer w10: J4.5 -1440,754.27 -1074,388.27 v1(-1074,-516) ; R2.1 R2.1@-649.49,1503 ; U1.29 -645.75,1440.26 v1(-649.49,1444) R2.1@-649.49,1503 ; v1(-552,1444) -611,1503 R2.1@-649.49,1503 ; v1(311.4,1362.6) C20.1
  Bottom Layer w10: J4.5 -1485,790 -1515,820 -1515,1100 -1430,1185 -921.47,1185 -787,1319.47 -787,1413 -756,1444 v1(-649.49,1444) ; v1(-1074,-516) J1.3 J2.3 20,-620 360,-280 SW_RES.1 ; v1(-552,1444) 230,1444 v1(311.4,1362.6)
NetC20_2: C20.2 U3.1 | length 166.6
  Top Layer w10: C20.2 469,1437.4 474.1,1442.5 U3.1
NetC22_1: C22.1 Rin.1 | length 102.1
  Top Layer w10: Rin.1 C22.1
NetC22_2: C22.2 C23.1 R11.1 | length 253.1
  Top Layer w10: R11.1 C23.1 -1098,-1347.4 -1023.2,-1272.6 C22.2
NetC24_2: C24.2 U4.2 U4.3 | length 236.9
  Top Layer w10: C24.2 -807,-1347.4 -779.4,-1375 U4.2 U4.3
NetF1_1: F1.1 FB1.2 | length 174.4
  Top Layer w20: FB1.2 933.82,448.82 985,500 F1.1
NetF1_2: F1.2 J3.1 | length 327.3
  Top Layer w20: F1.2 1207,576 1218.01,587.01 1453.7,587.01
NetJ1_1: J1.1 R4.1 U1.31 | length 5241.1
  Top Layer w10: v1(-708.74,1288) U1.31 ; 260.42,1265.42 260.42,1198.06 269,1189.49 R4.1 ; 260.43,1265.43 260.43,1274.6 268.04,1282.21 277.21,1282.21 v1(283,1288)
  Bottom Layer w10: J1.1 -986,-804 -1482,-804 -1790,-496 -1790,605 -1610,785 -1610,1105 -1170,1545 -630,1545 -602,1517 -602,1288 ; v1(-708.74,1288) v1(283,1288)
NetJ1_2: J1.2 R3.1 U1.30 | length 3502
  Top Layer w10: v1(-680,1089) -677.24,1091.76 -677.24,1140.24 ; U1.30 -677.24,1140.24 ; v1(-662,-672) v1(-662,681) ; v1(-653,1116) -677.24,1140.24 ; v1(355,1250.51) R3.1
  Bottom Layer w10: J1.2 -922,-672 v1(-662,-672) ; v1(-680,1089) -680,699 v1(-662,681) ; v1(-653,1116) -641,1128 -375.47,1128 -375.05,1127.58 251.07,1127.58 355,1231.51 v1(355,1250.51)
NetJ1_5: J1.5 U1.32 | length 3300.3
  Top Layer w10: v1(-810,1329) U1.32
  Bottom Layer w10: J1.5 -970,-405 -964,-405 -915,-356 -915,-300 -952.09,-262.91 -952.19,-263 -1087,-263 -1105,-245 -1695,-245 -1745,-195 -1745,565 -1550,760 -1550,1100 -1445,1205 -934,1205 v1(-810,1329)
NetJ1_6: J1.6 U1.1 | length 1826.9
  Top Layer w10: J1.6 -921,-271 -921,-186.43 -939,-168.43 -994,-168.43 -1018.43,-144 -1018.43,-88.43 -1000,-70 -939,-70 -921.57,-52.57 -921.57,1176.43 -827,1271 U1.1
NetJ1_7: J1.7 U1.2 | length 2231.3
  Top Layer w10: v1(-1046,-220) -1054.43,-211.57 -1054.43,424.43 -1389,759 -1389,922 -1371,940 -1308,940 -1083,1165 -975,1165 -845,1295 -761,1295 -761,1248 -770,1239 U1.2
  Bottom Layer w10: v1(-1046,-220) J1.7
NetJ1_8: J1.8 U1.9 U5.9 | length 3831.1
  Top Layer w10: v1(-903.57,-120) -903.57,928.43 -841,991 U1.9 ; v1(1220,-316) 1220,-552 1253,-585 U5.9
  Bottom Layer w10: J1.8 v1(-903.57,-120) -860.57,-163 587,-163 696,-272 1176,-272 v1(1220,-316)
NetJ1_9: J1.9 U1.10 U5.7 | length 6176.3
  Top Layer w10: U1.10 v1(-708.74,1119.26) ; v1(575,-70) 800,-295 800,-360 975,-535 1085,-535 1091.24,-528.76 1101.24,-528.76 U5.7 1159,-535 1195,-499 1195,-70 1198,-70 1198,-69.47 1211.47,-56 1230.53,-56 1244,-69.47 1244,-70 1375,-70 1415,-30 1415,320 v1(1395,340)
  Bottom Layer w10: J1.9 -920,-70 v1(575,-70) ; v1(-708.74,1119.26) -680,1148 219.96,1148 346.96,1275 460,1275 v1(1395,340)
NetJ1_10: J1.10 U1.11 U5.6 | length 3613.3
  Top Layer w10: v1(-736,142) v1(-736,653) ; v1(-732,919) -716.96,919 -677.24,958.72 U1.11 ; U5.6 1149,-485 1175.88,-458.12 1175.88,-74.88 v1(1142,-41)
  Bottom Layer w10: J1.10 -920,130 -748,130 ; v1(-736,142) -748,130 ; v1(-736,653) -736,915 v1(-732,919) ; v1(1142,-41) -574,-41 -745,130 -748,130
NetJ1_11: J1.11 R23.2 SW_MODE.2 U1.12 | length 2444
  Top Layer w10: U1.12 -645.75,1040 -628.75,1057 v1(-591,1057) ; R23.2 9.49,530.51 SW_MODE.2
  Bottom Layer w10: J1.11 -915,235 -285,235 SW_MODE.2 -57,597 -523,597 -544,618 -544,668 -533,679 -533,999 v1(-591,1057)
NetJ1_12: J1.12 R11.2 U1.13 | length 3964.5
  Top Layer w10: R11.2 -1172.49,-1510.51 -1194,-1489 -1194,-1195 -1019,-1020 -1019,-203.87 -1036.43,-186.43 -1036.43,213.57 J1.12 ; U1.13 v1(-614,1034)
  Bottom Layer w10: J1.12 -920,330 -802,330 -755,283 -267,283 -227,323 -227,363 -235,371 -340,371 -386.95,324.05 -558.06,324.05 -602.02,368 -602.02,547.98 -564,586 -564,695 -559,700 -559,979 v1(-614,1034)
NetJ1_13: J1.13 U1.14 | length 866
  Top Layer w10: v1(-582,944) U1.14
  Bottom Layer w10: J1.13 -917,433 -756,433 -582,607 v1(-582,944)
NetJ1_14: J1.14 J4.4 U1.15 | length 1530.9
  Top Layer w10: J4.4 -1260,890 -1225,855 -1225,735 J1.14 ; v1(-871,866) -871,906 -859,918 -763.53,918 -741.53,896 -597.47,896 -551,942.47 U1.15
  Bottom Layer w10: J4.4 -1176,890 -1152,866 v1(-871,866)
NetJ1_15: J1.15 J4.1 U1.16 | length 1587.3
  Top Layer w10: v1(-1168,913) -1168,778 -1129,739 ; v1(-1129,895) -1129,739 ; J1.15 -1129,739 ; v1(-832,895) -814.34,877.34 -784.03,877.34 -783.37,878 -550,878 -519,909 U1.16
  Bottom Layer w10: J4.1 -1390,940 -1195,940 v1(-1168,913) ; v1(-1129,895) v1(-832,895)
NetJ2_5: J2.5 R28.1 U1.22 | length 5591.5
  Top Layer w10: v1(-510,1177) -510,1189 -491,1208 U1.22 ; v1(712,1264) 712,713 801,624 1091,624 1130,585 1130,165 970,5 970,-112.82 ; v1(934,-370) 967,-337 967,-112 ; 970,-60.51 R28.1
  Bottom Layer w10: J2.5 -875,-365 -875,-300 -845,-270 -803,-270 -743,-210 437.57,-210 597.57,-370 v1(934,-370) ; v1(-510,1177) 214.84,1177 339.84,1302 674,1302 v1(712,1264)
NetJ2_6: J2.6 R27.1 U1.19 | length 3862.2
  Top Layer w10: v1(-532,1084) -503.24,1112.76 U1.19 ; v1(-483,676) -483,627 -493,617 -558,617 -621.43,553.57 -621.43,85.43 -175,-361 -175,-710 -150,-735 4.74,-735 35,-765.26 ; v1(-0.65,-588) -0.65,-730.65 -0.13,-730.13 35,-765.26 ; R27.1 70.51,-800.77 35,-765.26
  Bottom Layer w10: J2.6 -755,-255 -325,-255 -0.65,-579.35 v1(-0.65,-588) ; v1(-532,1084) -483,1035 v1(-483,676)
NetJ2_7: J2.7 U1.28 | length 2056.4
  Top Layer w10: v1(-614,1173) U1.28
  Bottom Layer w10: J2.7 -842,-220 -885,-177 -998,-177 -1041,-134 -1041,486 -990,537 -795,537 -759,573 -759,1106 -692,1173 v1(-614,1173)
NetJ2_8: J2.8 U1.27 | length 1681.8
  Top Layer w10: v1(-637,666) -644,659 -644,-98 v1(-622,-120) ; v1(-582,1104.33) U1.27
  Bottom Layer w10: J2.8 v1(-622,-120) ; v1(-637,666) -637,1049.33 v1(-582,1104.33)
NetJ2_9: J2.9 R26.1 U1.26 | length 2922.2
  Top Layer w10: R26.1 -1340.51,-160 -1398.25,-102.26 -1398.25,218.75 v1(-1275,342) ; J2.9 -885.57,45.57 -885.57,539.43 -880,545 v1(-880,585) -880,810 -830.66,859.34 -776.58,859.34 -775.91,860 -542,860 -495,907 -495,1029 -521.91,1055.91 -539,1055.91 -555.09,1072 -555.09,1107.07 -551,1111.15 U1.26
  Bottom Layer w10: v1(-1275,342) -1275,375 -1009,641 -935,641 -880,586 v1(-880,585)
NetJ2_10: J2.10 R25.1 U1.25 | length 2399
  Top Layer w10: J2.10 -739,80 -713,106 -713,690 -723,700 -780,700 -791.25,711.25 -813.75,733.75 -825,745 -825,790 -791.66,823.34 -421.66,823.34 -395,850 v1(-376.65,850) ; U1.25 -519,1326 -211,1326 -63.54,1178.54 -63.54,1081.58 -60.51,1081.58 R25.1 v1(-155,1060)
  Bottom Layer w10: v1(-376.65,850) -374,850 -164,1060 v1(-155,1060)
NetJ2_11: J2.11 U1.24 | length 1929.4
  Top Layer w10: U1.24 -221,1271 -180,1230 -180,1080 -195,1065 -195,265 v1(-217,243)
  Bottom Layer w10: J2.11 -795,205 -255,205 v1(-217,243)
NetJ2_12: J2.12 U1.23 | length 1296.4
  Top Layer w10: J2.12 -771.57,328.43 -771.57,652.57 v1(-819,700) ; v1(-527,1224) -512,1239 U1.23
  Bottom Layer w10: v1(-819,700) -780,739 -780,1175 -731,1224 v1(-527,1224)
NetJ2_15: J2.15 J4.3 R30.1 U1.17 | length 1964.4
  Top Layer w10: R30.1 -1735,750 -1595,890 J4.3 ; J2.15@-820,600 J2.15 -820,660 -855,695 -855,795 -808.66,841.34 -769.12,841.34 -768.46,842 -533,842 -461,914 U1.17
  Bottom Layer w10: J4.3 -1390,840 -1080,840 J2.15
NetJ3_2: R5.2 | length 234.5
  Top Layer w10: R5.2 1330,670 1381.5,618.5 1453.7,618.5
NetJ3_3: R6.2 | length 275.3
  Top Layer w10: R6.2 1265,800 1415,650 1453.7,650
NetLED1_A: LED1.A R1.2 | length 124.6
  Top Layer w10: R1.2 494,-900.51 505.16,-911.67 LED1.A
NetLED2_A: LED2.A R7.2 | length 87.8
  Top Layer w10: R7.2 LED2.A
NetLED2_C: LED2.C U3.10 | length 2695.1
  Top Layer w10: U3.10 517.5,1217.5 490,1190 490,1140 445,1095 195,1095 170,1120 170,1475 245,1550 725,1550 740,1535 1202,1535 1635,1102 1635,980 1615,960 LED2.C
NetLED3_A: LED3.A R8.2 | length 87.8
  Top Layer w10: R8.2 LED3.A
NetLED3_C: LED3.C U3.17 | length 1071.6
  Top Layer w10: U3.17 794.5,1367.5 927,1500 1190,1500 1581.67,1108.33 LED3.C
NetLED4_A: LED4.A R30.2 | length 77.8
  Top Layer w10: LED4.A R30.2
NetLED_BLUE_2: LED_BLUE.2 R28.2 | length 160.2
  Top Layer w10: R28.2 1169,0.51 1169.51,0 LED_BLUE.2
NetLED_GREEN_2: LED_GREEN.2 R26.2 | length 210.5
  Top Layer w10: R26.2 -1279.49,-130 -1230,-80.51 LED_GREEN.2
NetLED_RED_2: LED_RED.2 R25.2 | length 180.2
  Top Layer w10: LED_RED.2 0,1149.51 0.51,1149 R25.2
NetLED_YELLOW_2: LED_YELLOW.2 R27.2 | length 173.9
  Top Layer w10: LED_YELLOW.2 0,-1110 9.49,-1100.51 R27.2
NetR3_2: R3.2 U3.20 | length 1165.6
  Top Layer w10: R3.2 410,1155 385,1130 230,1130 210,1150 210,1450 275,1515 649.75,1515 722.25,1442.5 U3.20
NetR4_2: R4.2 U3.4 | length 303
  Top Layer w10: R4.2 336.49,1287 422,1287 502.5,1367.5 U3.4
NetR5_1: R5.1 U3.12 | length 1015
  Top Layer w10: U3.12 734.5,1242.5 730,1238 730,740 798,672 1179.49,672 R5.1
NetR6_1: R6.1 U3.11 | length 933.9
  Top Layer w10: U3.11 797.5,1217.5 815,1200 815,735 840,710 1045,710 1135,800 R6.1
NetR15_2: R15.2 SW_RED.2 U5.4 | length 3145.7
  Top Layer w10: R15.2 -9.51,1780.51 ; SW_RED.2 -10,1781 -9.51,1780.51 ; U5.4 961.1,-385 952.32,-393.78 917,-393.78 899.37,-376.15 899.37,124.63 595,429 595,535 577,553 432,553 125,860 125,1646 -9.51,1780.51
NetR16_2: R16.2 SW_GREEN.2 U5.3 | length 3664.7
  Top Layer w10: SW_GREEN.2 -1780.51,-77.91 R16.2 -1780.51,-433 v1(-1436.51,-777) ; v1(1052,-335) U5.3
  Bottom Layer w10: v1(-1436.51,-777) -29,-777 338,-410 977,-410 v1(1052,-335)
NetR17_2: R17.2 SW_YELLOW.2 U5.2 | length 2271.6
  Top Layer w10: R17.2 -138.94,-1790.51 SW_YELLOW.2 ; v1(995,-460) 995,-440 1025,-410 1149,-410 1157.88,-401.12 1157.88,-293.88 1149,-285 U5.2
  Bottom Layer w10: SW_YELLOW.2 -98.43,-1663.43 995,-570 v1(995,-460)
NetR18_2: R18.2 SW_BLUE.2 U5.1 | length 979.7
  Top Layer w10: U5.1 1107,-235 1107,-134 v1(1135,-106) ; SW_BLUE.2 1651.57,-126.57 1719.49,-194.49 R18.2
  Bottom Layer w10: v1(1135,-106) 1545.57,-106 SW_BLUE.2
NetR19_2: R19.2 SW_START.2 U5.13 | length 1899
  Top Layer w10: SW_START.2 -38.43,60 162,60 181.49,79.49 R19.2 269.49,79.49 255,65 255,-281 v1(410,-436) ; v1(1243,-405) 1263,-385 U5.13
  Bottom Layer w10: v1(410,-436) 1221,-436 1237,-420 1237,-405 v1(1243,-405)
NetR20_2: R20.2 SW_LAST.2 U5.12 | length 2835.4
  Top Layer w10: SW_LAST.2 -513.43,45 -315,45 -280.51,79.49 R20.2 ; v1(1221,-79) 1221,-278 1253,-310 1333,-310 1343,-320 1343,-425 1333,-435 U5.12
  Bottom Layer w10: SW_LAST.2 -503.43,185 987.54,185 1186.54,-14 1186.54,-44.54 v1(1221,-79)
NetR21_2: R21.2 SW_LONGEST.2 U5.11 | length 1855.5
  Top Layer w10: SW_LONGEST.2 481.57,50 657,50 686.49,79.49 R21.2 ; U5.11 1344,-485 v1(1353,-476)
  Bottom Layer w10: SW_LONGEST.2 545.57,-14 1150.54,-14 1168.54,-32 1168.54,-48 1144.89,-71.65 1124.35,-71.65 1109,-87 1109,-129.93 1353,-373.93 v1(1353,-476)
NetR22_2: R22.2 SW_AUX.2 U5.10 | length 861.5
  Top Layer w10: SW_AUX.2@1080,-910 1140,-850 1360,-850 1389.49,-879.49 R22.2 1445,-599 1381,-535 U5.10
NetRf_1: Rf.1 Rin.2 U4.4 | length 493.1
  Top Layer w10: Rin.2 -870,-1510.51 -834.49,-1475 U4.4 -651,-1475 -640.51,-1485.49 Rf.1
NetRf_2: Rf.2 SPK1.1 U4.5 | length 512.3
  Top Layer w10: Rf.2 -579.49,-1483.49 -571,-1475 U4.5 -466,-1475 -435,-1506 -278.42,-1506 -254.42,-1530 SPK1.1
NetSPK1_2: SPK1.2 U4.8 | length 423.2
  Top Layer w10: U4.8 -447,-1325 -402,-1280 -297,-1280 -255,-1322 -255,-1385 SPK1.2
VBAT: BT1.1 D1.1 J2.1 | length 1085.3
  Top Layer w20: BT1.1 -690,-820 J2.1 -445,-820 -432.32,-832.68 D1.1
VCC_3_3V: C18.2 C19.2 J2.14 U3.13 | length 2624.4
  Top Layer w15: U3.13 861.9,1267.5 892,1237.4
  Top Layer w20: v1(-618,640) v1(-520.47,640) ; v1(873.65,758) 873.65,1219.05 892,1237.4 C18.2 C19.2
  Bottom Layer w20: J2.14 -778,480 v1(-618,640) ; v1(-520.47,640) 784,640 873.65,729.65 v1(873.65,758)
VCC_5V: C3.2 C4.2 C8.2 C9.2 C13.1 C16.2 C17.2 C21.2 C25.2 D2.2 FB2.1 J2.4 J4.2 R1.1 R2.2 R7.1 R8.1 R15.1 R16.1 R17.1 R18.1 R19.1 R20.1 R21.1 R22.1 R23.1 TP_5V.1 U1.4 U1.6 U2.5 U3.3 U3.14 U3.15 U4.1 U4.6 U5.16 | length 18860.8
  Top Layer w15: U3.3 v1@612.5,1392.5 ; U3.14 U3.15 867.5,1317.5 902.6,1352.6 C16.2 ; v1(950,1295) C16.2@950,1347.6
  Top Layer w20: R16.1 -1719.49,245.49 -1812,338 -1812,743 -1521,1034 -1521,1106 -1467,1160 C13.1 -1397.4,1047.4 J4.2 -1120,1210 -992,1210 -930,1272 -930,1471 -891,1510 R2.2 -825,1510 -825,1640 -745,1720 -638.82,1720 FB2.1 FB2.1@-647,1620 ; v1(-854,1112.76) U1.6 -796.76,1115 -756,1115 -756,1168 -764,1176 U1.4 ; -638.82,1719.49 R15.1 -184.49,1719.49 -95,1630 -95,1580 75,1410 75,684.49 R23.1 135,680 317.68,497.32 D2.2 510,348 302.51,140.51 R19.1 260,170 235,195 -222,195 -239,178 -239,140.51 R20.1 -303.01,140.51 -303.01,538.01 -455,690 -455,757.4 C9.2 ; -455,704.05 -591.64,704.05 -647.59,760 C8.2 -677.6,709 -690,696.6 -690,-390 J2.4 -895,-595 -895,-880.43 -810,-965.43 -810,-1278 -763,-1325 U4.1 -635,-1325 -625.57,-1334.43 -625.57,-1413.43 -614,-1425 U4.6 -429,-1425 -426.6,-1427.4 C21.2 -286.6,-1427.4 -235,-1479 -170,-1479 -161,-1488 -161,-1616 -239,-1694 -239,-1729.49 R17.1 ; U2.5 373.65,-632.6 ; 338.11,175 338.11,91.89 720,-290 TP_5V.1 ; R1.1 394.49,-839.49 373.65,-818.65 373.65,-632.6 ; 506.98,344.98 711.44,140.51 R21.1 ; C16.2 C17.2 1142.4,1352.6 1349.49,1145.51 R8.1 R7.1 1349.49,912 1371.49,890 1529,890 1585,834 1585,795 1625,755 1625,700 1585,660 1585,617.51 1620,582.51 1620,535 1585,500 1585,-5 ; U5.16 1445,-235 1445,-145 1585,-5 ; C25.2@1442.6,-235 C25.2 ; R18.1 1780.51,-334.49 1750,-365 1585,-365 ; 373.65,-632.6 C3.2 C4.2 717.4,-632.6 TP_5V.1 ; TP_5V.1 720,-655 1095,-1030 1320,-1030 1409.49,-940.51 1539.49,-940.51 1585,-895 1585,-365 ; 1585,-365 1585,-5
  Bottom Layer w15: v1(615,1390) 665,1390 760,1295 v1(950,1295)
  Bottom Layer w20: J4.2 -1315,1015 -977.71,1015 -926.77,1065.94 -869.58,1065.94 -853.17,1082.34 -853.17,1105.54 -857.2,1109.56 v1(-854,1112.76)
VCC_USB: C14.2 C15.2 D2.1 FB1.1 | length 498.5
  Top Layer w20: D2.1 527.32,680 614,680 670,624 C15.2 C14.2 843,547.4 846.78,551.18 FB1.1
VIN: D1.2 SW_ON.2 | length 420.5
  Top Layer w20: D1.2 -70,-360 SW_ON.2
VIN_SW: C1.2 SW_ON.1 U2.1 U2.3 | length 599.9
  Top Layer w20: SW_ON.1 108.43,-442.57 80,-471 C1.2 165,-632.6 ; U2.3 165,-708 156,-699 156,-641.6 165,-632.6 ; U2.1 165,-632.6
pads on no net: BT1.0 J3.D+ J3.D- J3.GND J3.ID J3.MTN1 J3.MTN2 J3.MTN3 J3.MTN4 J3.VBUS SW_MODE.3 SW_ON.3 U3.2 U3.5 U3.7 U3.8 U3.9 U3.18 U3.19 U5.14 U5.15

## Polygon pours and split planes (outlines as drawn)
GND on Bottom Layer "Bottom Layer-GND" (solid, pour order 6): -2000,2000 2000,2000 2000,-2000 -2000,-2000 -2000,2000
GND on Top Layer "Top Layer-GND" (solid, pour order 4): -2000,2000 2000,2000 2000,-2000 -2000,-2000 -2000,2000

## Silkscreen, mask and mechanical layers (free items; w line width, h text height)
Top Overlay:
  text "MPU" at -465,1355 h80
  text "RX" at 1205,1050 h60
  text "1" at -1540,1035 h50
  text "MISO" at -1665,970 h40
  text "+5V" at -1255,970 h40
  text "TX" at 1205,935 h60
  text "MOSI" at -1255,875 h40
  text "SCK" at -1635,870 h40
  text "Resetn" at -1745,775 h40
  text "GND" at -1255,770 h40
  text "ISP" at -1490,610 h80
  text "15" at -1176.27,544.64 h65
  text "15" at -725,545 h65
  text "Mode" at -130,350.28 h80
  text "USB" at 1460,330 h80
  text "Longest" at 285,-105 h80
  text "Last" at -620,-110 h80
  text "Start" at -160,-110 h80
  text "ON" at 0,-465 h80
  text "MPU Reset" at 330,-495 h50
  text "Color" at -1900,-520 h50 r293.33
  text "Match" at -1800,-765 h50 r298.69
  text "GPIO" at -1465,-770 h80
  text "2018" at 1785,-825 h50 r67.96
  text "1" at -725,-865 h65
  text "1" at -1090,-870 h65
  text "Game" at -1665,-1015 h50 r305.42
  text "Electronics" at 1475,-1310 h50 r56.59
  text "Crashcourse" at 1015,-1695 h50 r39.49
  text "SPKR" at 430,-1790 h80
  text "SIMONDUINO" at -270,-1970 h60
Bottom Overlay:
  text "CRASHCOURSE" at 1060,1435 h200
  text "Electronics" at 735,1190 h150
  text "Simonduino" at 1150,-1335 h250
Mechanical 4:
  circle w10: c0,0 r2000

## Text inside footprints (layer, text, board x,y; h text height)
LED1: Courtyard Bottom "A" at 556.06,-925.45 h15.5; Courtyard Bottom "C" at 556.06,-822.33 h15.5
LED2: Courtyard Bottom "A" at 1484.55,963.94 h15.5 r270; Courtyard Bottom "C" at 1587.67,963.94 h15.5 r270
LED3: Courtyard Bottom "A" at 1484.55,1073.94 h15.5 r270; Courtyard Bottom "C" at 1587.67,1073.94 h15.5 r270
LED4: Courtyard Bottom "A" at -1731.06,590.45 h15.5 r180; Courtyard Bottom "C" at -1731.06,487.33 h15.5 r180
LED_BLUE: Top Overlay "K" at 1420,-15 h30; Courtyard Top "K" at 1420,-15 h30
LED_GREEN: Top Overlay "K" at -1400,5 h30 r180; Courtyard Top "K" at -1400,5 h30 r180
LED_RED: Top Overlay "K" at 15,1410 h30 r90; Courtyard Top "K" at 15,1410 h30 r90
LED_YELLOW: Top Overlay "K" at -15,-1360 h30 r270; Courtyard Top "K" at -15,-1360 h30 r270